# EAGLE board MCP9802 (EAGLE 7.2.0)
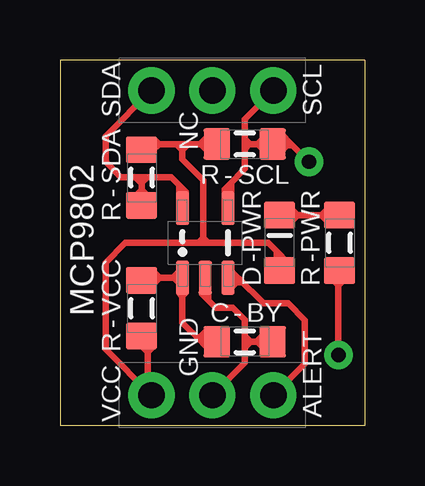
[diagram p0: board, top side]
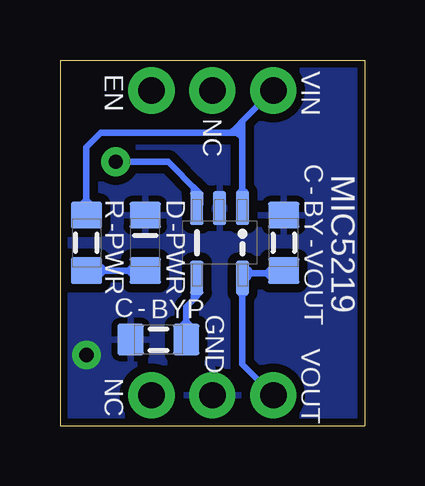
[diagram p1: board, bottom side, seen from below]

Size 12.7 x 15.24 mm. Coordinates in mm from the lower left corner, seen from the top.
Outline: 12.7,15.24 0,15.24 0,0 12.7,0 12.7,15.24
Copper layers (1*16): Top 0.035mm / dielectric 1.5mm / Bottom 0.035mm
Design rules "ITEADstudio_DRC *": minimum track width 10mil, minimum drill 12mil, track to track 10mil, track to pad 10mil, pad to pad 10mil, via to via 10mil, smd to smd 0mil, copper to edge 12mil, drill to drill 12mil, minimum pad ring 10mil, minimum via ring 6mil, stop-mask expansion 2mil, vias tented up to drill 100mil, thermal gap 10mil
Net classes: 0 default: clearance 0.355 mm

## Footprints (pad centres in the part's own frame; a part is rotated, then mirrored left to right if it is on the bottom)
SOT-23-5 = smd 1.4 x 0.55: 1 -1.45,0.95; 2 -1.45,0; 3 -1.45,-0.95; 4 1.45,-0.95; 5 1.45,0.95
0805 = smd 1.1 x 1.3: 1 -1.16,0; 2 1.16,0
DIODE_0805 = smd 1.1 x 1.3: A 1.16,0; C -1.16,0
HEADER_2.54MM_6_PIN_VER = drill 1.1 pad 1.925: 1 -6.35,2.54; 2 -6.35,0; 3 -6.35,-2.54; 4 6.35,-2.54; 5 6.35,0; 6 6.35,2.54

## Placement (x,y rotation side)
MCP9802  MCP9802A0T-M/OT  [SOT-23-5]  6.05,7.62 90 top
MCP9802-C-BY  (100nF/50V, X7R, 5%, 08055C104J4Z2A)  [0805]  7.7,3.5 0 top
MCP9802-D-LED  (GREEN, HSMG-C170)  [DIODE_0805]  9.15,7.62 270 top
MCP9802-J1  HEADER_6_PIN  [HEADER_2.54MM_6_PIN_VER]  6.35,7.62 90 top
MCP9802-R-LED  (1K/0.5W, 1%, ERJ-P06F1001V)  [0805]  11.65,7.62 90 top
MCP9802-R-SCL  (2K2/0.25W, 5%, ERJ-T06J222V)  [0805]  7.7,11.74 180 top
MCP9802-R-SDA  (2K2/0.25W, 5%, ERJ-T06J222V)  [0805]  3.4,10.34 90 top
MCP9802-R-VCC  (200R/0.5W, 1%, ERJ-P06F2000V)  [0805]  3.4,4.9 90 top
VREG-C-BP1  (2.2uF/50V, X7R, 10%, CGA4J3X7R1H225K125AE)  [0805]  3.38,7.62 270 bottom
VREG-C-BP2  (470pF/50V, C0G (NP0), 5%, C0805C471J5GACAUTO)  [0805]  8.6,3.59 0 bottom
VREG-D-LED  (GREEN, HSMG-C170)  [DIODE_0805]  9.15,7.62 270 bottom
VREG-MIC5219  MIC5219-5.0YM5-TR  [SOT-23-5]  6.05,7.62 270 bottom
VREG-R-LED  (1K/0.5W, 1%, ERJ-P06F1001V)  [0805]  11.6,7.62 90 bottom

## Library data of the parts
MCP9802 MCP9802-C-BY MCP9802-D-LED MCP9802-J1 MCP9802-R-LED MCP9802-R-SCL MCP9802-R-SDA MCP9802-R-VCC VREG-C-BP1 VREG-C-BP2 VREG-D-LED VREG-MIC5219 VREG-R-LED = TDAR4

## Nets
MCP9802-ALERT: MCP9802-J1.3 MCP9802.3
MCP9802-FILTERED-VCC: MCP9802-C-BY.1 MCP9802-R-VCC.2 MCP9802.1
MCP9802-GND: MCP9802-C-BY.2 MCP9802-J1.2 MCP9802-R-LED.1 MCP9802.2 VREG-C-BP1.1 VREG-C-BP2.1 VREG-D-LED.C VREG-MIC5219.2
MCP9802-LED: MCP9802-D-LED.C MCP9802-R-LED.2
MCP9802-SCL: MCP9802-J1.4 MCP9802-R-SCL.1 MCP9802.4 VREG-MIC5219.3
MCP9802-SDA: MCP9802-J1.6 MCP9802-R-SDA.1 MCP9802.5 VREG-MIC5219.1 VREG-R-LED.2
MCP9802-VCC: MCP9802-D-LED.A MCP9802-J1.1 MCP9802-R-SCL.2 MCP9802-R-SDA.2 MCP9802-R-VCC.1 VREG-C-BP1.2 VREG-MIC5219.5
MCP9802-VREG-BYP: VREG-C-BP2.2 VREG-MIC5219.4
MCP9802-VREG-LED: VREG-D-LED.A VREG-R-LED.1

## Tracks (layer width: path | path; a pad name or v marks a point on that pad's centre or on a via)
MCP9802-ALERT
  Top 0.279: 7.41,6.17 8.48,5.1 9.5,5.1 10.2,4.4 10.2,2.58 MCP9802-J1.3 | 7.41,6.17 MCP9802.3 7.03,6.17 7.22,5.98 7.22,5.92 7.1,5.8 7.05,5.8 | 6.96,6.42 7.16,6.42 7.26,6.32 | 7.26,6.32 7.46,6.12 | 7.46,6.12 7.56,6.02 7.53,5.98 | 7.46,6.12 7.42,6.12 | 7.41,6.17 7.26,6.32 | 7.08,5.7 7.37,5.98 7.53,5.98 | 7.53,5.98 7.6,5.98
MCP9802-FILTERED-VCC
  Top 0.279: MCP9802.1 3.4,6.17 MCP9802-R-VCC.2 3.4,6.12 3.91,6.12 | MCP9802.1 5.1,4.3 5.9,3.5 | 5.9,3.5 MCP9802-C-BY.1 | 3.91,6.12 3.91,6.42 4.16,6.17 3.91,5.92 3.91,6.12 | 4.97,6.13 4.97,5.93 4.72,6.18 4.97,6.43 4.97,6.13 | MCP9802.1 5.1,6.13 4.97,6.13 | 6.22,3.8 6.04,3.62 5.9,3.62 | 5.8,3.62 5.78,3.62 6.06,3.34 6.18,3.34 | 5.9,3.5 5.9,3.62 | 6.22,3.73 6.14,3.66 5.8,3.66 | 5.8,3.66 6.11,3.97 6.31,3.97 | 5.8,3.66 5.8,3.62 | 5.8,3.62 5.9,3.62 | 4.97,5.67 4.97,5.53 5.1,5.4 5.24,5.54 5.24,5.83 5.22,5.84 5.22,6.17 MCP9802.1
MCP9802-GND  (via drill 0.6 pad 1.2)
  Top 0.279: MCP9802.2 6.05,5.58 | 6.05,5.58 6.05,5.36 6.5,4.91 7.21,4.91 7.7,4.42 7.7,3.5 | 7.7,3.5 7.7,2.62 MCP9802-J1.2 | 7.95,3.5 MCP9802-C-BY.2 8.19,3.5 8.19,3.52 | 7.95,3.5 7.7,3.5 | 7.95,3.51 7.7,3.26 7.7,3.76 7.95,3.51 | 8.19,3.52 8.44,3.77 8.44,3.27 8.19,3.52 | 7.95,3.51 7.95,3.5 | 5.94,5.88 5.92,5.85 5.92,5.58 | 6.18,5.22 5.92,5.49 5.92,5.58 | 6.21,5.2 6.18,5.22 | 6.18,5.22 6.18,5.6 | 5.92,5.58 6.05,5.58 | v11.6,2.95 11.6,6.46 MCP9802-R-LED.1 11.43,6.24 11.41,6.24 11.3,6.13 11.32,6.13 11.59,5.86 11.62,5.86 11.84,6.08
  pour Bottom (isolate 0.279): 0.16,0.16 0.16,15.08 12.54,15.08 12.54,0.16
MCP9802-LED
  Top 0.279: 11.14,9.03 10.89,8.78 11.14,8.53 11.14,9.03 | 9.66,8.53 9.91,8.78 9.66,9.03 9.66,8.53 | 11.14,9.03 11.39,8.78 MCP9802-R-LED.2 MCP9802-D-LED.C 9.4,8.78 9.66,8.53
MCP9802-SCL  (via drill 0.6 pad 1.2)
  Top 0.279: MCP9802-R-SCL.1 8.89,11.77 | MCP9802-J1.4 7.7,12.78 7.7,11.74 | MCP9802-R-SCL.1 7.7,11.74 | 7.7,11.74 7.7,10.7 7,10 VREG-MIC5219.3 7,9.32 7.14,9.46 7.14,10.13 6.87,9.86 6.87,9.51 | v10.38,11 9.63,11.74 | 9.63,11.74 MCP9802-R-SCL.1 | 7.7,11.52 7.91,11.74 7.87,11.79 | 7.87,11.79 7.7,11.96 | 8.58,11.44 8.54,11.44 8.24,11.74 | 8.53,11.94 8.43,11.94 8.23,11.74 8.24,11.74 | 8.24,11.74 MCP9802-R-SCL.1 | 7.7,11.74 7.75,11.79 7.87,11.79 | 9.1,11.47 9.33,11.69 9.59,11.69 | 9.59,11.69 9.68,11.69 9.45,11.92 9.24,11.92 9.17,11.85 9.17,11.38 | 9.17,11.37 9.17,11.38 | 9.17,11.38 9.5,11.71 | 9.63,11.74 9.59,11.69 | 9.6,11.73 9.6,11.77 9.55,11.82 | 9.55,11.82 9.29,12.07 | 9.59,11.69 9.55,11.73 9.55,11.82
  Bottom 0.279: v10.38,11 8.2,11 7,9.8 VREG-MIC5219.3 7,9.2 7.01,9.2 7.13,9.33 7.13,9.93 6.86,9.66 6.86,9.23
MCP9802-SDA
  Top 0.279: 3.4,10.36 2.54,10.36 1.9,11 1.9,12.06 MCP9802-J1.6 | 3.4,10.36 4.63,10.36 4.96,10.04 | 4.96,10.04 5.1,9.89 | 5.1,9.89 VREG-MIC5219.1 | MCP9802-R-SDA.1 3.4,9.67 | 3.4,9.67 3.4,10.35 | 3.4,10.35 3.64,10.35 3.39,10.1 3.14,10.35 3.4,10.35 | 3.41,9.84 3.66,9.59 3.16,9.59 3.41,9.84 | 3.41,9.84 3.41,9.67 3.4,9.67 | 3.4,10.36 3.4,10.35 | 4.74,10.26 4.96,10.04 | 5.04,9.38 5.23,9.56 5.23,9.76 5.1,9.89 | 4.96,10.03 4.97,10.02 | 4.97,10.02 4.97,9.56 | 4.97,10.02 5.1,9.89
  Bottom 0.279: MCP9802-J1.6 5.1,12.68 5.1,12.2 | 5.1,12.2 VREG-MIC5219.1 5.1,9.36 4.97,9.49 4.97,9.7 5.1,9.84 5.24,9.71 5.24,9.24 5.16,9.17 | 5.32,12.2 11,12.2 11.6,11.6 VREG-R-LED.2 11.6,9.27 | 11.6,9.27 11.76,9.27 11.61,9.42 11.46,9.27 11.6,9.27 | 5.16,12.2 5.16,12.35 5.31,12.2 5.16,12.05 5.16,12.2 | 5.1,12.2 5.16,12.2 | 5.11,12.2 5.58,12.2 | 5.65,12.2 5.58,12.2 | 5.58,12.2 5.32,12.46 | 5.32,12.46 5.08,12.7 | 5.16,12.2 5.32,12.2 | 5.32,12.2 5.32,12.46
MCP9802-VCC
  Top 0.279: 6.18,7.62 8.68,7.62 9.15,7.15 MCP9802-D-LED.A 9.18,6.46 9.18,6.54 9.02,6.7 9.02,7.26 9.52,6.77 9.52,6.71 | 6.18,7.62 5.97,7.62 | 5.97,7.62 5.97,10.23 5.1,11.1 5.1,11.73 | 5.97,7.62 2.72,7.62 1.9,6.8 1.9,3.18 MCP9802-J1.1 3.65,1.43 3.65,3.74 MCP9802-R-VCC.1 3.4,3.31 | 5.1,11.74 MCP9802-R-SCL.2 5.84,11.74 5.84,11.75 | 5.1,11.74 3.4,11.74 MCP9802-R-SDA.2 3.62,11.5 3.62,11.78 3.75,11.91 3.96,11.91 4.13,11.74 3.85,11.46 3.77,11.46 | 3.4,3.31 3.9,3.31 3.65,3.06 3.4,3.31 | 5.35,11.73 5.1,11.73 | 5.1,11.73 4.85,11.73 5.1,11.48 5.35,11.73 | 5.84,11.75 6.09,12 6.09,11.5 5.84,11.75 | 5.1,11.74 5.1,11.73 | 5.35,11.73 5.35,11.71 5.25,11.71 | 6.18,7.62 5.96,7.83 5.79,7.66 5.79,7.63
  Bottom 0.279: VREG-MIC5219.5 5.1,6.36 3.38,6.36 VREG-C-BP1.2 3.38,6.5 3.96,6.5 | MCP9802-J1.1 5.1,2.56 VREG-MIC5219.5 | 4.88,6.21 4.88,6.51 4.73,6.36 4.88,6.21 | 3.96,6.5 3.96,6.2 4.11,6.35 3.96,6.5 | 5.21,5.72 5.24,5.68 5.24,5.58 5.1,5.43 4.97,5.56 4.97,5.75 5.1,5.75 VREG-MIC5219.5 | VREG-MIC5219.5 4.88,6.17 4.88,6.21
MCP9802-VREG-BYP
  Bottom 0.279: 7.44,4.36 7.59,4.21 7.29,4.21 7.44,4.36 | 7.44,4.36 VREG-C-BP2.2 7.44,4.96 7,5.4 VREG-MIC5219.4 7,6.06 7.01,6.06 7.13,5.94 7.13,5.3 7.12,5.29 6.87,5.54 6.87,5.86
MCP9802-VREG-LED
  Bottom 0.279: 9.7,6.31 9.7,6.61 9.85,6.46 9.7,6.31 | 11,6.62 11,6.32 10.85,6.47 11,6.62 | 11,6.62 11.6,6.62 VREG-R-LED.1 VREG-D-LED.A 9.15,6.31 9.7,6.31

## Text on the board
tNames: SDA | SCL | NC | SDA | - | R | - | SCL | R | PWR | PWR | MCP9802 | - | - | VCC | D | R | C | - | BY | - | R | GND | ALERT | VCC
bNames: VIN | EN | NC | C | - | BY | D | R | MIC5219 | - | - | - | PWR | PWR | VOUT | BYP | - | C | GND | VOUT | NC